# Altium PCB MODULIQ_Hub_ESP32-S3.PcbDoc (part 1 of 2)
Units mm, origin at the board's own origin, x right, y up, seen from the top; angles counter-clockwise.
Board outline 24 x 76.5 mm, 4 copper layers (Top, Layer 1, Layer 2, Bot), stack 1.483 mm thick; 56 components, 63 nets, 265 pads, 248 vias.
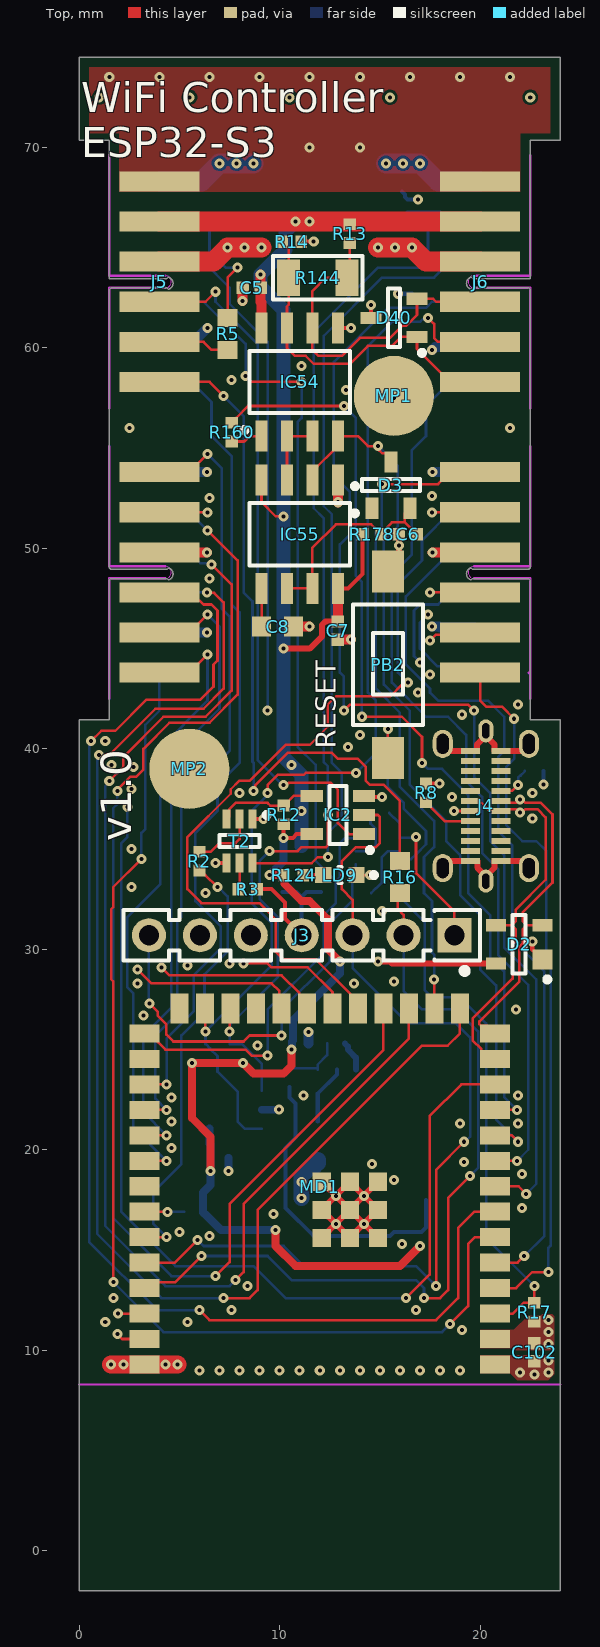
[diagram p0: Top view]
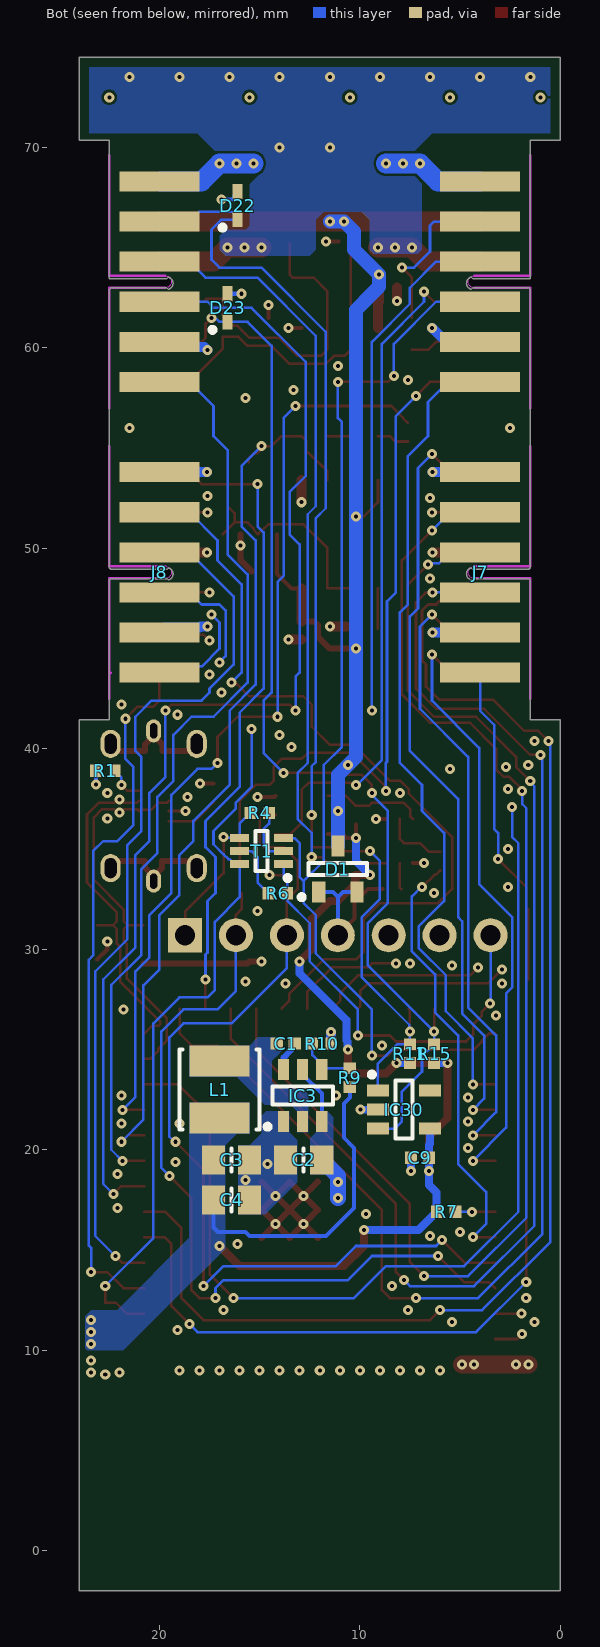
[diagram p1: Bot view, seen from below]
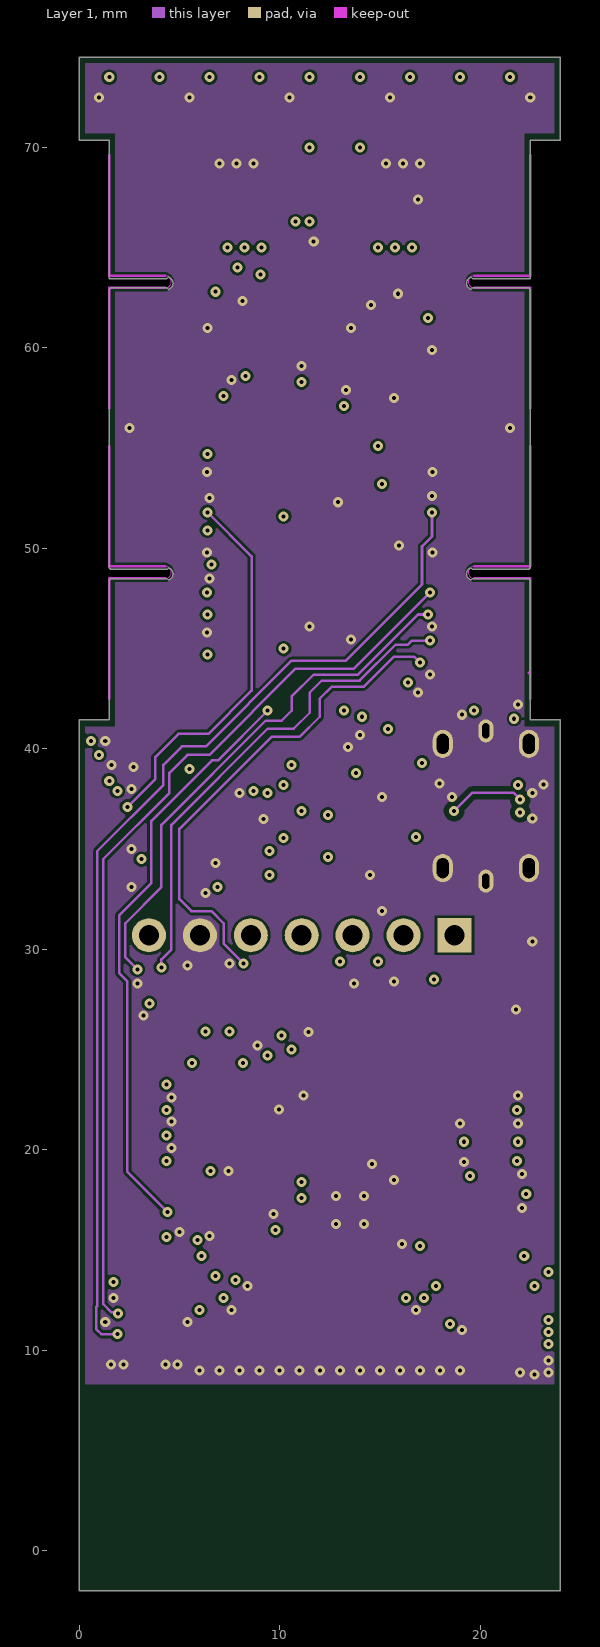
[diagram p2: Layer 1]
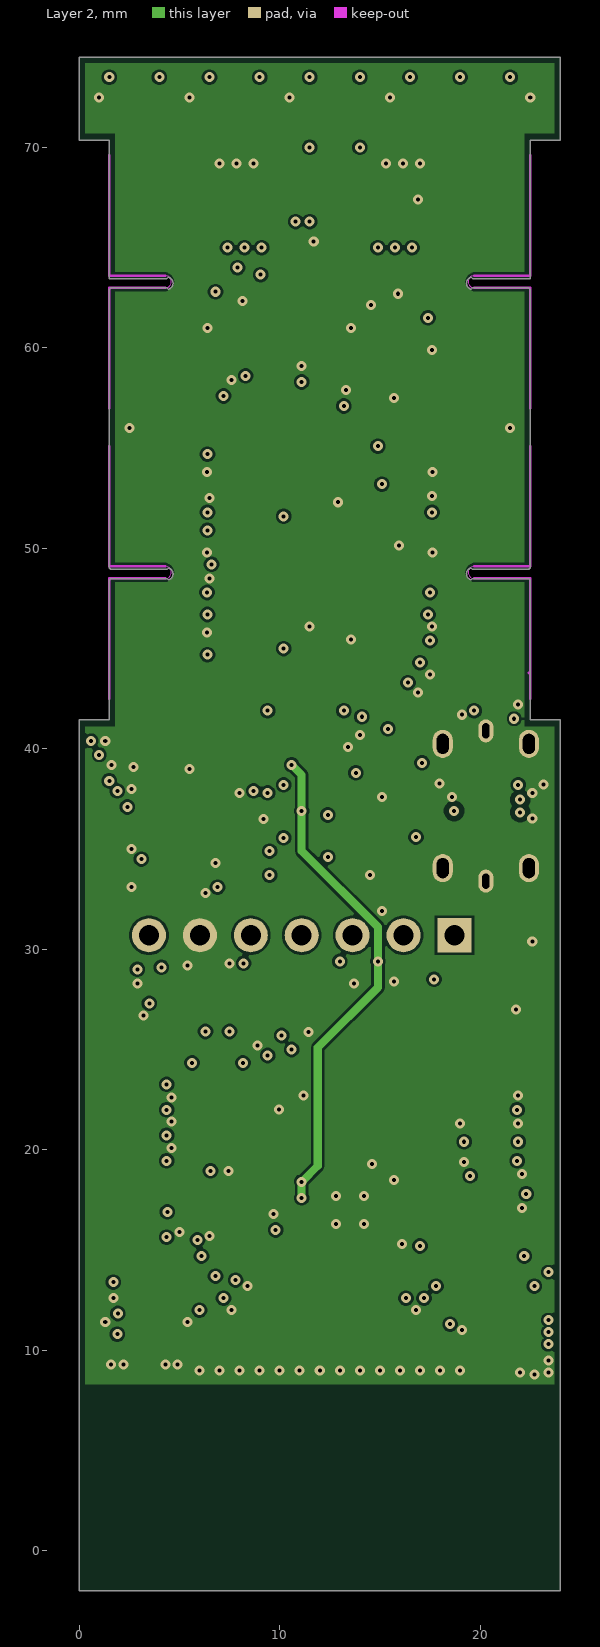
[diagram p3: Layer 2]
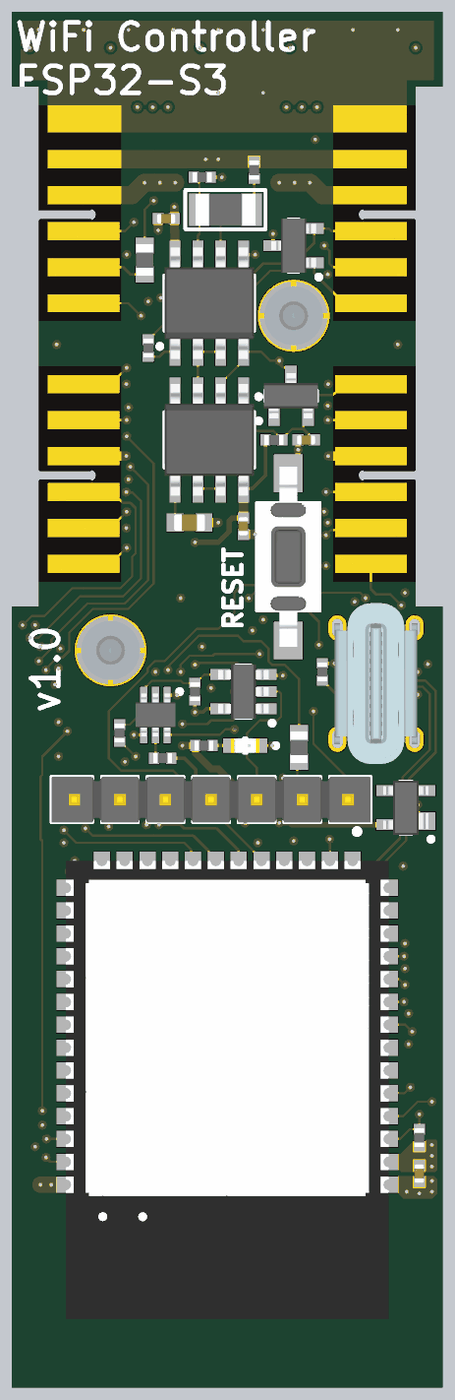
[diagram p4: 3D render of the assembled board from above, using the file's embedded part models]
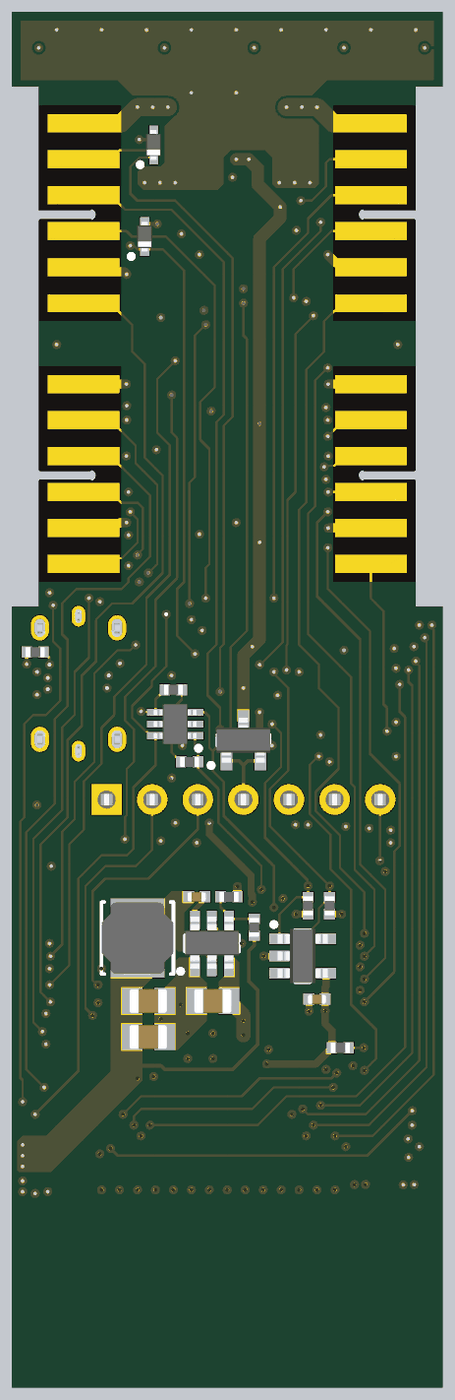
[diagram p5: 3D render of the assembled board from below, using the file's embedded part models]

## Layer stack, top to bottom
TopSolder: solder mask 0.0102, Solder Resist, Dk 3.5
Top: signal copper 0.0356
Dielectric 1: prepreg 0.0711, PP-006, Dk 4.1
Layer 1: signal copper 0.035
Dielectric1: core 1.2, FR-4, Dk 4.8
Layer 2: signal copper 0.035
Dielectric 2: prepreg 0.0711, PP-006, Dk 4.1
Bot: signal copper 0.0356
BottomSolder: solder mask 0.0102, Solder Resist, Dk 3.5

## Board outline
0,-2 0,41.44 1.5,41.44 1.5,48.413 1.577,48.49 4.377,48.49 4.452,48.428 ccw(c4.377,48.723) 4.681,48.723 ccw(c4.377,48.723) 4.452,49.019 4.377,48.957 1.577,48.957 1.5,49.033 1.5,55.023 1.5,62.913 1.577,62.99 4.377,62.99 4.452,62.928 ccw(c4.377,63.223) 4.681,63.223 ccw(c4.377,63.223) 4.452,63.519 4.377,63.457 1.5,63.457 1.5,70.347 0,70.347 0,74.5 24,74.5 24,70.347 22.5,70.347 22.5,63.457 19.623,63.457 19.548,63.519 ccw(c19.623,63.223) 19.319,63.223 ccw(c19.623,63.223) 19.548,62.928 19.623,62.99 22.423,62.99 22.5,62.913 22.5,55.023 22.5,49.033 22.423,48.957 19.623,48.957 19.548,49.019 ccw(c19.623,48.723) 19.319,48.723 ccw(c19.623,48.723) 19.548,48.428 19.623,48.49 22.423,48.49 22.5,48.413 22.5,41.44 24,41.44 24,-2

## Design rules (kind name [scope] priority, off if disabled: settings)
Clearance Clearance_DIFF [(InDifferentialPairClass('All Differential Pairs'))] p1: gap=0.127 ignorepadtopadclearanceinfootprint=FALSE except(0: Arc-Hole Track-Hole SMDPad-Hole THPad-Hole Via-Hole Fill-Hole Poly-Hole Region-Hole Text-Hole; 0.254: Arc-Poly Track-Poly SMDPad-Poly THPad-Poly Via-Poly Fill-Poly Poly-Poly Poly-Region Poly-Text)
Clearance [All] p2: gap=0.127 ignorepadtopadclearanceinfootprint=FALSE
ComponentClearance [All] p1: gap=0.254 collisioncheckmode=3 verticalgap=0.254 showdistances=FALSE donotcheckwithout3dbody=TRUE
DiffPairsRouting [All] p1: maxlimit=0.213 minlimit=0.127 mostfreqgap=0.213 toplayer_mingap=0.213 toplayer_minwidth=0.127 toplayer_maxwidth=0.127 toplayer_prefwidth=0.127 bottomlayer_mingap=0.213 bottomlayer_minwidth=0.127 bottomlayer_maxwidth=0.127 bottomlayer_prefwidth=0.127 impedanceprofiledriven=TRUE impedanceprofileid={C2320997-7D1D-4DD8-87E8-E6E409B28112} impedanceprofilevalue=90.000000 maxuncoupledlength=12.7
FabricationTestPointUsage TestPointUsage [All] p1: valid=0 allowmultiple=FALSE
FabricationTestpoint Testpoint [All] p1: side=3 testpointundercomponent=TRUE minsize=1.016 maxsize=2.54 preferedsize=1.524 minholesize=0.508 maxholesize=1.016 preferedholesize=0.813 testpointgrid=0.025 allowsidetop=TRUE allowsidebottom=TRUE usegrid=TRUE gridtolerance=0
HoleSize [All] p1: absolutevalues=TRUE maxlimit=3.81 minlimit=0.025 maxpercent=80.000 minpercent=20.000
HoleToHoleClearance [All] p1: gap=0.025 allowstackedmicrovias=TRUE
MinimumSolderMaskSliver [All] p1: minsoldermaskwidth=0
PlaneClearance [All] p1: clearance=0.254
PlaneConnect [All] p1: planeconnectstyle=Direct reliefexpansion=0.508 reliefentries=4 reliefconductorwidth=0.254 reliefairgap=0.254
PolygonConnect [All] p1: connectstyle=Direct reliefconductorwidth=0.254 reliefentries=4 polygonreliefangle="45 Angle" airgapwidth=0.254
PolygonConnect PolygonConnect_pad [(InPadClass('All Pads'))] p2: connectstyle=Relief reliefconductorwidth=0.254 reliefentries=4 polygonreliefangle="90 Angle" airgapwidth=0.254
RoomDefinition MODULIQ_Hub_ESP32-S3 [InComponentClass('MODULIQ_Hub_ESP32-S3')] p1 off: confinementstyle=ConfineIn formatcopy=TRUE lockcomponents=FALSE outline 45.15,13.15 227.899,13.15 227.899,36.9 45.15,36.9
RoutingVias [All] p1: holewidth=0.2 width=0.5 viastyle="Through Hole" minholewidth=0.2 minwidth=0.5 maxholewidth=1 maxwidth=1.2
SilkToSilkClearance [All] p1: silktosilkclearance=0
SilkToSolderMaskClearance SilkscreenOverComponentPads [IsPad] p1: minsilkscreentomaskgap=0 clearancetoexposedcopper=TRUE
SolderMaskExpansion [All] p1: expansion=0.051 istentingtop=FALSE
SupplyNets "Schematic Supply Nets_3" [InNet('P5V0')] p1: voltage=0.000
SupplyNets "Schematic Supply Nets_2" [InNet('P3V3')] p2: voltage=0.000
SupplyNets "Schematic Supply Nets_1" [InNet('P12V0')] p3: voltage=0.000
SupplyNets "Schematic Supply Nets" [InNet('GND')] p4: voltage=0.000
Width [All] p1: maxlimit=1.27 minlimit=0.127 preferedwidth=0.127
19 further rules are at their usual default settings.

## Classes and differential pairs
net class D90: USB_D_N USB_D_P
differential pair USB_D: +USB_D_P -USB_D_N

## Components (designator, comment, footprint, x,y, rotation, side; value= is the part's Value field where it differs from the comment)
C1 "100nF" CAPC1005X55N 13.7,25.3 r0 bottom
C2 "22uF" CAPC2012X145N 12.8,19.5 r180 bottom
C3 "22uF" CAPC2012X145N 16.4,19.5 r0 bottom
C4 "22uF" CAPC2012X145N 16.4,17.5 r0 bottom
C5 "100nF" CAPC1005X55N 8.6,63 r180 top
C6 "100nF" CAPC1005X55N 16.4,50.7 r0 top
C7 "100nF" CAPC1005X55N 12.9,45.9 r270 top
C8 "10nF" CAPC1608X87N 9.9,46.1 r180 top
C9 "100nF" CAPC1005X55N 7,19.6 r0 bottom
C102 "1uF" CAPC1005X55N 22.7,9.9 r90 top
D1 "BAT54C" SOT95P240X130-3N 11.1,34 r90 bottom
D2 "PRTR5V0U2X" SOT190P230X110-4N 21.95,30.25 r180 top
D3 "BAT54C" SOT95P240X130-3N 15.55,53.15 r90 top
D22 "PESD3V3S1UB" SODFL1608X65N 16.1,67.1 r90 bottom
D23 "PESD3V3S1UB" SODFL1608X65N 16.6,62 r90 bottom
D40 "SM712" SOT95P237X112-3N 15.7,61.5 r180 top
IC2 "74V1G66STR" SOT95P280X145-5N 12.9,36.7 r180 top
IC3 "AP62201WU-7" SOT95P285X110-6N 12.85,22.7 r90 bottom
IC30 "24AA02E48T-I/OT" SOT95P280X145-5N 7.8,22 r180 bottom
IC54 "ST485ECDR" SOIC127P600X175-8N 11,58.3 r90 top
IC55 "NE555D" SOIC127P600X175-8N 11,50.7 r270 top
J3 "Header 7" SAMTEC_TSW-107-07-L-S-LL 18.72,30.7 r180 top
J4 "USB 3.1" MOLEX_2047110001 20.285,37.148 r90 top
J5 "" EDGE12T1B6_P200W1000L0F100X400 4,63.3 r270 top
J6 "" EDGE12T5B10_P200W1000L0F100X400 20,63.3 r90 top
J7 "" EDGE12T5B10_P200W1000L0F100X400 4,48.8 r90 bottom locked
J8 "" EDGE12T1B6_P200W1000L0F100X400 20,48.8 r270 bottom locked
L1 "2.2uH" IND_MURATA_LQH44PN_P0 17,23 r270 bottom
LD9 "Green" LED_KINGBRIGHT_KPH-1608CGCK 13,33.7 r180 top
MD1 "ESP32-S3-WROOM-1-N4R8" ESP32-S3-WROOM-1 12,15.64 r180 top locked
MP1 "M1.6 x 3mm" 97730306330 15.7,57.6 r0 top
MP2 "M1.6 x 3mm" 97730306330 5.5,39 r0 top
PB2 "Push Button" PB_TYCO_FSMSM 15.4,44.2 r90 top
R1 "5k1" RESC1005X40N 22.7,38.9 r180 bottom
R2 "10k" RESC1005X40N 6,34.4 r90 top
R3 "10k" RESC1005X40N 8.4,33 r0 top
R4 "1k" RESC1005X40N 15,36.8 r180 bottom
R5 "0" RESC1608X55N 7.4,60.7 r270 top
R6 "1k" RESC1005X40N 14.1,32.8 r0 bottom
R7 "1k" RESC1005X40N 5.7,16.9 r180 bottom
R8 "5k1" RESC1005X40N 17.3,37.8 r270 top
R9 "75k" RESC1005X40N 10.5,23.6 r270 bottom
R10 "24k" RESC1005X40N 11.9,25.3 r0 bottom
R11 "10k" RESC1005X40N 7.5,24.8 r270 bottom
R12 "10k" RESC1005X40N 10.2,36.7 r270 top
R13 "1k" RESC1005X40N 13.5,65.7 r270 top
R14 "1k" RESC1005X40N 10.6,65.3 r0 top
R15 "10k" RESC1005X40N 6.3,24.8 r270 bottom
R16 "0" RESC1608X55N 16,33.6 r270 top
R17 "1k" RESC1005X40N 22.7,11.9 r90 top
R124 "1k" RESC1005X40N 10.7,33.7 r180 top
R144 "120R" 1206R 11.9,63.5 r0 top
R160 "1k" RESC1005X40N 7.6,55.8 r270 top
R178 "3k9" RESC1005X40N 14.6,50.7 r0 top
T1 "BC847BS" SOT65P210X110-6N 14.9,34.9 r0 bottom
T2 "BC847BS" SOT65P210X110-6N 8,35.4 r270 top

## Footprints (in the part's own frame and the unit in brackets; to place one, negate y for a bottom-side part, rotate by r counter-clockwise, add the part's x,y. Pads: shape width x height; smd on the part's side, far side on the other; paste and mask are expansions set on the pad)
1206R [mm]
  rect 1.15x1.8 smd: 1(-1.45,0) 2(1.45,0)
  silkscreen extent -2.24,-1.09 2.24,1.09, body extent -1.67,-0.87 1.68,0.88, height 0.65
97730306330 [mm] "SMT Steel Spacer with internal Thread M1.6 Bottom closed, height 3mm"
  round 4 smd paste-2539.97: 1(0,0)
  body extent -1.65,-1.65 1.65,1.65, height 3
CAPC1005X55N [mm] "Capacitor, Non-Polarized, Chip; 1.00mm L X 0.50mm W X 0.70mm H, IPC Medium Density"
  rect 0.62x0.62 smd: 1(-0.45,0) 2(0.45,0)
  body extent -0.52,-0.27 0.53,0.28, height 0.55
CAPC1608X87N [mm] "Chip Capacitor, Body 1.6x0.8mm IPC Medium Density"
  rect 0.95x1 smd: 1(-0.8,0) 2(0.8,0)
  body extent -0.87,-0.47 0.88,0.48, height 0.87
CAPC2012X145N [mm] "Chip Capacitor, Body 2.0x1.45mm, IPC Medium Density"
  rect 1.15x1.45 smd: 1(-0.9,0) 2(0.9,0)
  silkscreen extent 0,-0.58 0,0.58, body extent -1.05,-0.67 1.05,0.68, height 1.45
EDGE12T1B6_P200W1000L0F100X400 [mm] "12 contacts Board Edge Connector, First Left Top Pad 1, First Left Bottom Pad 2, Pitch 2mm, Length 0mm, Width 12.5mm, Finger Lenght 4mm, Finger Width 1mm"
  rect 1x4 smd paste-0.5: 1(-5,0) 2(-3,0) 3(-1,0) 4(1,0) 5(3,0) 6(5,0)
  rect 1x4 smd far side paste-0.5: 7(-5,0) 8(-3,0) 9(-1,0) 10(1,0) 11(3,0) 12(5,0)
  KeepOutLayer lines w0.05: 0.3,0.3 ccw(c0,0.3) -0.3,0.3
  KeepOutLayer lines w0.13: 6.3,-2.5 0.3,-2.5 0.3,0.3 ; -6.3,-2.5 -0.3,-2.5 -0.3,0.3
EDGE12T5B10_P200W1000L0F100X400 [mm] "12 contacts Board Edge Connector, First Left Top Pad 5, First Left Bottom Pad 10, Pitch 2mm, Length 0mm, Width 12.5mm, Finger Lenght 4mm, Finger Width 1mm"
  rect 1x4 smd paste-0.5: 1(5,0) 2(3,0) 3(1,0) 4(-1,0) 5(-3,0) 6(-5,0)
  rect 1x4 smd far side paste-0.5: 7(5,0) 8(3,0) 9(1,0) 10(-1,0) 11(-3,0) 12(-5,0)
  KeepOutLayer lines w0.05: -0.3,0.3 cw(c0,0.3) 0.3,0.3
  KeepOutLayer lines w0.13: -0.3,0.3 -0.3,-2.5 -6.3,-2.5 ; 0.3,0.3 0.3,-2.5 6.3,-2.5
ESP32-S3-WROOM-1 [mm]
  rect 1.5x0.9 smd: 1(-8.75,6.35) 2(-8.75,5.08) 3(-8.75,3.81) 4(-8.75,2.54) 5(-8.75,1.27) 6(-8.75,0) 7(-8.75,-1.27) 8(-8.75,-2.54) 9(-8.75,-3.81) 10(-8.75,-5.08) 11(-8.75,-6.35) 12(-8.75,-7.62) 13(-8.75,-8.89) 14(-8.75,-10.16) 27(8.75,-10.16) 28(8.75,-8.89) 29(8.75,-7.62) 30(8.75,-6.35) 31(8.75,-5.08) 32(8.75,-3.81) 33(8.75,-2.54) 34(8.75,-1.27) 35(8.75,0) 36(8.75,1.27) 37(8.75,2.54) 38(8.75,3.81) 39(8.75,5.08) 40(8.75,6.35)
  rect 0.9x1.5 smd: 15(-6.985,-11.405) 16(-5.715,-11.405) 17(-4.445,-11.405) 18(-3.175,-11.405) 19(-1.905,-11.405) 20(-0.635,-11.405) 21(0.635,-11.405) 22(1.905,-11.405) 23(3.175,-11.405) 24(4.445,-11.405) 25(5.715,-11.405) 26(6.985,-11.405)
  rect 0.9x0.9 smd: PAD(-2.9,-1.365) PAD(-2.9,0.035) PAD(-2.9,-2.765) PAD(-1.5,0.035) PAD(-1.5,-1.365) PAD(-1.5,-2.765) PAD(-0.1,0.035) PAD(-0.1,-1.365) PAD(-0.1,-2.765)
  body extent -9,-11.66 9,13.84, height 3.12
IND_MURATA_LQH44PN_P0 [mm] "Wire Wound Ferrite Inductor for Power Lines, 4mm L X 4mm W X 1.65mm H, MURATA LQH44PN_P0 Series"
  rect 1.55x3 smd: 1(-1.425,0) 2(1.425,0)
  silkscreen extent -2,-2 2,2, body extent -2,-2 2,2, height 1.65
LED_KINGBRIGHT_KPH-1608CGCK [mm] "SMT Green LED, Case 0603, Body L 1.6 x W 0.8mm H 0.65mm"
  rect 0.8x0.8 smd: 1(-0.825,0) 2(0.825,0)
  silkscreen extent -1.83,-0.4 0.08,0.4, body extent -0.8,-0.4 0.8,0.4, height 0.65
MOLEX_2047110001 [mm]
  rect 0.3x0.95 smd: A1(2.75,-0.75) A2(2.25,-0.75) A3(1.75,-0.75) A4(1.25,-0.75) A5(0.75,-0.75) A6(0.25,-0.75) A7(-0.25,-0.75) A8(-0.75,-0.75) A9(-1.25,-0.75) A10(-1.75,-0.75) A11(-2.25,-0.75) A12(-2.75,-0.75) B1(-2.75,0.755) B2(-2.25,0.755) B3(-1.75,0.755) B4(-1.25,0.755) B5(-0.75,0.755) B6(-0.25,0.755) B7(0.25,0.755) B8(0.75,0.755) B9(1.25,0.755) B10(1.75,0.755) B11(2.25,0.755) B12(2.75,0.755)
  oval 1.15x0.75 hole 0.35 slot 0.75 at 0 deg: SHIELD(-3.75,0) SHIELD(3.75,0)
  oval 1.4x1 hole 0.6 slot 1 at 0 deg: SHIELD(-3.1,-2.15) SHIELD(-3.1,2.15) SHIELD(3.1,-2.15) SHIELD(3.1,2.15)
  body extent -4.47,-2.3 4.47,2.3, height 9.06
PB_TYCO_FSMSM [mm] "Body 3.5x6.0mm, Pushbutton Switch,  TYCO FSMSM Serie"
  rect 2.1x1.6 smd: 1(-4.65,0) 2(4.65,0)
  silkscreen extent -3,-1.75 3,1.75, body extent -5,-1.75 5,1.75, height 4.3
RESC1005X40N [mm] "Chip Resistor, EIA 0402, Metric 1005, Body 1.0x0.5mm, IPC Medium Density"
  rect 0.58x0.62 smd: 1(-0.47,0) 2(0.47,0)
  body extent -0.52,-0.27 0.53,0.28, height 0.4
RESC1608X55N [mm] "Chip Resistor, EIA 0603, Metric 1608, Body 1.6x0.8mm, IPC Medium Density"
  rect 0.9x1 smd: 1(-0.8,0) 2(0.8,0)
  body extent -0.87,-0.47 0.88,0.48, height 0.55
SAMTEC_TSW-107-07-L-S-LL [mm] "7 Contacts - Pitch 2.54mm - Single Row  Through Mount Straigh Header (Post Lead 5.84mm, Tail Lead 2.54mm, Insulator 2.54mm)"
  rect 1.7x1.7 hole 1: 1(0,0)
  round 1.7 hole 1: 2(2.54,0) 3(5.08,0) 4(7.62,0) 5(10.16,0) 6(12.7,0) 7(15.24,0)
  silkscreen extent -1.27,-1.27 16.51,1.93, body extent -1.27,-1.27 16.51,1.27, height 8.38
SODFL1608X65N [mm] "Ultra Small Outline Diode Flat Lead (SOD-523), Body; 1.2mm L X 0.8mm W X 0.65mm H, IPC Medium Density"
  rect 0.75x0.5 smd: 1(-0.7,0) 2(0.7,0)
  silkscreen extent -1.22,0.63 -0.98,0.88, body extent -0.82,-0.42 0.83,0.43, height 0.65
SOIC127P600X175-8N [mm] "SOIC 8, Pitch 1.27mm - Body 4x5mm, IPC Medium Density"
  rect 1.55x0.6 smd: 1(-2.7,1.905) 2(-2.7,0.635) 3(-2.7,-0.635) 4(-2.7,-1.905) 5(2.7,-1.905) 6(2.7,-0.635) 7(2.7,0.635) 8(2.7,1.905)
  silkscreen extent -2.52,-2.5 1.55,2.88, body extent -3.1,-2.5 3.1,2.5, height 1.75
SOT65P210X110-6N [mm] "SOT363, SC70-6, SOT, 0.65mm Pitch, 6 Pin, 1.25mm W X 2.00mm L X 1.10mm H, IPC Medium Density"
  rect 0.95x0.4 smd: 1(-1.1,0.65) 2(-1.1,0) 3(-1.1,-0.65) 4(1.1,-0.65) 5(1.1,0) 6(1.1,0.65)
  silkscreen extent -1.42,-1 0.3,1.47, body extent -1.2,-1.1 1.2,1.1, height 1.1
SOT95P237X112-3N [mm] "SOT, 0.95mm, pitch; 3 pin,1.30mm W X 2.92mm L X 1.12mm H body, IPC Medium Density"
  rect 1.05x0.6 smd: 1(-1.15,0.95) 2(-1.15,-0.95) 3(1.15,0)
  silkscreen extent -1.53,-1.45 0.3,1.87, body extent -1.25,-1.5 1.25,1.5, height 1.1
SOT95P240X130-3N [mm] "SOT23 3-Leads, Pitch 0.95mm - Body 1.3x2.9mm, IPC Medium Density"
  rect 1.05x0.65 smd: 1(-1.15,0.95) 2(-1.15,-0.95) 3(1.15,0)
  silkscreen extent -1.52,-1.45 0.3,1.92, body extent -1.25,-1.5 1.25,1.5, height 1.3
SOT95P280X145-5N [mm] "SOT, 0.95mm pitch; 5 pin, 1.60mm W X 2.90mm L X 1.45mm H body, IPC Medium Density"
  rect 1.1x0.6 smd: 1(-1.3,0.95) 2(-1.3,0) 3(-1.3,-0.95) 4(1.3,-0.95) 5(1.3,0.95)
  silkscreen extent -1.73,-1.45 0.43,1.87, body extent -1.4,-1.5 1.4,1.5, height 1.45
SOT95P285X110-6N [mm] "SOT, 0.95mm, pitch; 6 pin,1.625mm W X 3.025mm L X 1.10mm H body, IPC Medium Density"
  rect 1.05x0.55 smd: 1(-1.3,0.95) 2(-1.3,0) 3(-1.3,-0.95) 4(1.3,-0.95) 5(1.3,0) 6(1.3,0.95)
  silkscreen extent -1.67,-1.5 0.45,1.88, body extent -1.4,-1.5 1.48,1.5, height 1.1
SOT190P230X110-4N [mm] "SOT143, SOT, 1.90mm Pitch; 4 Pin, 1.30mm W X 2.90mm L X 1.10mm H body, IPC Medium Density"
  rect 1x1 smd: 1(-1.15,0.75)
  rect 1x0.6 smd: 2(-1.15,-0.95) 3(1.15,-0.95) 4(1.15,0.95)
  silkscreen extent -1.53,-1.45 0.33,1.87, body extent -1.25,-1.5 1.25,1.5, height 1.1

## Part data
C1: library part CC0402_100NF_16V_10%_X5R, "Non-polarised capacitor", Case=0402, Manufacturer=GENERIC, Manufacturer1 ComponentHeight=0.55mm, Manufacturer1 Example=MURATA, Manufacturer1 Part Number=GRM155R61C104KA88D, Tolerance=±10%, Voltage=16V, Author="CERN DEM JLC", Component Type=Standard, CreateDate=2013-12-10, HelpURL=\\cern.ch\dfs\Applications\Altium\Datasheets\CC0402_X5R_MURATA_GRM.pdf, LatestRevisionDate=2013-12-10, Manufacturer Part Number=CC0402_100NF_16V_10%_X5R, Mounted=Yes, Part Description="SMD Multilayer Chip Ceramic Capacitor", Part Number=CC0402_100NF_16V_10%_X5R, Pin Count=2, SMD=Yes, Socket=No, Status=None, Table="Capacitors SMD", TC=X5R
C2 C3 C4: library part CC0805_22UF_25V_20%_X5R, "Non-polarised capacitor", Case=0805, Manufacturer=GENERIC, Manufacturer1 ComponentHeight=1.45mm, Manufacturer1 Example=MURATA, Manufacturer1 Part Number=GRM21BR61E226ME44, Tolerance=±20%, Voltage=25V, Author="CERN DEM WB", Component Type=Standard, ComponentHeight=1.45mm, CreateDate=08.10.2021, HelpURL=\\cern.ch\dfs\Applications\Altium\Datasheets\CC0805_MURATA_GRM21BR61E226ME44.pdf, LatestRevisionDate=08.10.2021, Manufacturer Part Number=CC0805_22UF_25V_20%_X5R, Mounted=Yes, Part Description="Chip Multilayer Ceramic Capacitor for General Purpose", Part Number=CC0805_22UF_25V_20%_X5R, Pin Count=2, Sense=No, SMD=Yes, Socket=No, Status=Preferred, TC=X5R
C5 C6 C7 C9: library part CC0402_100NF_16V_10%_X7R, "Non-polarised capacitor", Case=0402, Manufacturer=GENERIC, Manufacturer1 ComponentHeight=0.55mm, Manufacturer1 Example=MURATA, Manufacturer1 Part Number=GRM155R71C104KA88D, Tolerance=±10%, Voltage=16V, Author="CERN DEM JLC", Component Type=Standard, CreateDate=05.12.2013, HelpURL=\\cern.ch\dfs\Applications\Altium\Datasheets\CC0402_X7R_MURATA_GRM.pdf, LatestRevisionDate=03.12.2007, Manufacturer Part Number=CC0402_100NF_16V_10%_X7R, Mounted=Yes, Part Description="SMD Multilayer Chip Ceramic Capacitor", Part Number=CC0402_100NF_16V_10%_X7R, Pin Count=2, Sense=No, SMD=Yes, Socket=No, Status="Not Recommended", TC=X7R
C8: library part CC0603_10NF_50V_5%_C0G, "Non-polarised capacitor", Case=0603, Manufacturer=GENERIC, Manufacturer1 ComponentHeight=0.9mm, Manufacturer1 Example=TDK, Manufacturer1 Part Number=C1608C0G1H103J080AA, Tolerance=±5%, Voltage=50V, Author="CERN DEM JLC", Component Type=Standard, CreateDate=10.12.2014, HelpURL=\\cern.ch\dfs\Applications\Altium\Datasheets\CC0603_C0G_TDK_C.pdf, LatestRevisionDate=10.12.2014, Manufacturer Part Number=CC0603_10NF_50V_5%_C0G, Mounted=Yes, Part Description="SMD Multilayer Chip Ceramic Capacitor", Part Number=CC0603_10NF_50V_5%_C0G, Pin Count=2, Sense=No, SMD=Yes, Socket=No, Status=Preferred, TC=C0G/NP0
C102: library part CC0402_1UF_16V_10%_X5R, "Non-polarised capacitor", Case=0402, Manufacturer=GENERIC, Manufacturer1 ComponentHeight=0.55mm, Manufacturer1 Example=TDK, Manufacturer1 Part Number=C1005X5R1C105KT, Tolerance=±10%, Voltage=16V, Author="CERN DEM JLC", Component Type=Standard, CreateDate=25.10.2012, HelpURL=\\cern.ch\dfs\Applications\Altium\Datasheets\CC0402_X5R_TDK_C.pdf, LatestRevisionDate=25.10.2012, Manufacturer Part Number=CC0402_1UF_16V_10%_X5R, Mounted=Yes, Part Description="SMD Multilayer Chip Ceramic Capacitor", Part Number=CC0402_1UF_16V_10%_X5R, Pin Count=2, Sense=No, SMD=Yes, Socket=No, Status=Preferred, TC=X5R
D1 D3: "Dual Common Cathode Schottky Diodes", Case=SOT23-3, Manufacturer="FAIRCHILD SEMICONDUCTOR", Power=200mA, Voltage=30V, Author="CERN DEM JLC", Bonding=No, Component Type=Standard, ComponentHeight=1.30mm, CreateDate=17.09.2009, Device=BAT54C, HelpURL=\\cern.ch\dfs\Applications\Altium\Datasheets\BAT54C.pdf, LatestRevisionDate=27.05.2010, Manufacturer Part Number=BAT54C, Mounted=Yes, PackageDescription="SOT23 3-Leads, Pitch 0.95mm - Body 1.3x2.9mm, IPC Medium Density", Part Description="Dual Common Cathode Small Signal Schottky Diode", Part Number=BAT54C, Pin Count=3, PressFit=No, Sense=No, SMD=Yes, Socket=No
D2: "Ultra Low Capacitance Double Rail-to-Rail ESD Protection Diode", Case=SOT143B, Manufacturer="NXP SEMICONDUCTORS", Voltage=5.5V, Author="CERN DEM JLC", Bonding=No, Component Type=Standard, ComponentHeight=1.1mm, CreateDate=3/22/2011, Device=PRTR5V0U2X, HelpURL=\\cern.ch\dfs\Applications\Altium\Datasheets\PRTR5V0U2X.pdf, LatestRevisionDate=3/22/2011, Manufacturer Part Number=PRTR5V0U2X, Mounted=Yes, PackageDescription="SOT143B, SOT, 1.90mm Pitch; 4 Pin, 1.30mm W X 2.90mm L X 1.10mm H body, IPC Medium Density", Part Description="Ultra Low Capacitance (1pF) Double Rail-to-Rail ESD Protection Diode (8kV)", Part Number=PRTR5V0U2X, Pin Count=4, PressFit=No, Sense=No, SMD=Yes, Socket=No
D22 D23: "ESD protection diode", Case=SOD523, Manufacturer="NXP SEMICONDUCTORS", Power=330W, Voltage=3V3, Author="CERN DEM JLC", Bonding=No, ComponentHeight=0.65mm, Component Type=Standard, CreateDate=29.11.2012, Device=PESD3V3S1UB, HelpURL=\\cern.ch\dfs\Applications\Altium\Datasheets\PESD3V3S1UB.pdf, LatestRevisionDate=29.11.2012, Manufacturer Part Number=PESD3V3S1UB, Mounted=Yes, PackageDescription="Ultra Small Outline Diode Flat Lead (SOD-523), Body; 1.2mm L X 0.8mm W X 0.65mm H, IPC Medium Density", Part Description="ESD protection diode (23kV)", Part Number=PESD3V3S1UB, Pin Count=2, PressFit=No, Sense=No, SMD=Yes, Socket=No
D40: "Asymmetrical TVS Diode for Extended Common-Mode RS-485", Case=SOT-23, Manufacturer=SEMTECH, Power=400W, Voltage=12V/-7V, Author="CERN DEM JLC", Bonding=No, ComponentHeight=1.12mm, Component Type=Standard, CreateDate=23.04.2012, Device=SM712, HelpURL=\\cern.ch\dfs\Applications\Altium\Datasheets\SM712.pdf, LatestRevisionDate=23.04.2012, Manufacturer Part Number=SM712, Mounted=Yes, PackageDescription="SOT, 0.95mm, pitch; 3 pin,1.30mm W X 2.92mm L X 1.12mm H body, IPC Medium Density", Part Description="Asymmetrical TVS Diode for Extended Common-Mode RS-485", Part Number=SM712, Pin Count=3, PressFit=No, Sense=No, SMD=Yes, Socket=No, Status=Obsolete
IC2: "Single Bilateral Switch", Case=SOT23-5, Manufacturer="ST MICROELECTRONICS", Author="CERN DEM JLC", Bonding=No, Component Type=Standard, ComponentHeight=1.45mm, CreateDate=20.01.2014, Device=74V1G66STR, HelpURL=\\cern.ch\dfs\Applications\Altium\Datasheets\74V1G66STR.pdf, LatestRevisionDate=20.01.2014, Manufacturer Part Number=74V1G66STR, Mounted=Yes, PackageDescription="SOT, 0.95mm pitch; 5 pin, 1.60mm W X 2.90mm L X 1.45mm H body, IPC Medium Density", Part Description="Single Bilateral Switch", Part Number=74V1G66STR, Pin Count=5, PressFit=No, Sense=No, SMD=Yes, Socket=No
IC3: library part PM_AP62201WU-7, "LIGHT LOAD IMPROVED 1.5A SYNCH DC/DC BUCK CONVERTER", Case=SOT26, Manufacturer="DIODES INCORPORATED", Author=GK, Bonding=No, Component Type=Standard, ComponentHeight=1.45mm, CreateDate=10.07.2015, Device=AP62201WU-7, HelpURL=\\cern.ch\dfs\Applications\Altium\Datasheets\AP133-WG-7.pdf, LatestRevisionDate=10.07.2015, Manufacturer Part Number=AP62201WU-7, Mounted=Yes, PackageDescription="SOT23, 0.95mm pitch; 6 pin, 1.6mm W X 3.0mm L X 1.45mm H body, IPC Medium Density", Part Description="LIGHT LOAD IMPROVED 1.5A SYNCH DC/DC BUCK CONVERTER", Part Number=AP62201WU-7, Pin Count=5, PressFit=No, Sense=No, SMD=Yes, Socket=No
IC30: "1.7V-5.5V, 2K I2C Serial EEPROM With EUI-48 Node Identity", Case=SOT23-5, Manufacturer="MICROCHIP TECHNOLOGY", Author="CERN DEM MR", Bonding=No, ComponentHeight=1.45mm, Component Type=Standard, CreateDate=31.03.2016, Device=24AA02E48T-I/OT, HelpURL=\\cern.ch\dfs\Applications\Altium\Datasheets\24AA02E48T-I-OT.pdf, LatestRevisionDate=31.03.2016, Manufacturer Part Number=24AA02E48T-I/OT, Mounted=Yes, PackageDescription="SOT, 0.95mm pitch; 5 pin, 1.60mm W X 2.90mm L X 1.45mm H body, IPC Medium Density", Part Description="1.7V-5.5V, 2K I2C Serial EEPROM With EUI-48 Node Identity", Part Number=24AA02E48T-I/OT, Pin Count=5, PressFit=No, Sense=No, SMD=Yes, Socket=No
IC54: "±15kV ESD-Protected, Low Power  RS-485/RS-422 Transceiver", Case=SOIC8, Manufacturer="ST MICROELECTRONICS", Author="CERN DEM MR", Bonding=No, ComponentHeight=1.75mm, Component Type=Standard, CreateDate=15.02.2018, Device=ST485ECDR, HelpURL=\\cern.ch\dfs\Applications\Altium\Datasheets\ST485ECDR.pdf, LatestRevisionDate=15.02.2018, Manufacturer Part Number=ST485ECDR, Mounted=Yes, PackageDescription="SOIC 8, Pitch 1.27mm - Body 4x5mm, IPC Medium Density", Part Description="±15kV ESD-Protected, Low Power  RS-485/RS-422 Transceiver", Part Number=ST485ECDR, Pin Count=8, PressFit=No, Sense=No, SMD=Yes, Socket=No
IC55: "Precision Timer", Case=SOIC8, Manufacturer="TEXAS INSTRUMENTS", Author="CERN DEM JMW", Bonding=No, ComponentHeight=1.75mm, Component Type=Standard, CreateDate=16.04.2009, Device=NE555D, HelpURL=\\cern.ch\dfs\Applications\Altium\Datasheets\NE555D.pdf, LatestRevisionDate=16.04.2009, Manufacturer Part Number=NE555D, Mounted=Yes, PackageDescription="SOIC 8, Pitch 1.27mm, Body 4x5mm, IPC Medium Density", Part Description="Precision Timer", Part Number=NE555D, Pin Count=8, PressFit=No, Sense=No, SMD=Yes, Socket=No
J3: library part SAMTEC_TSW-107-07-L-S-LL, "Connector 7 Male", Manufacturer=SAMTEC, Manufacturer Part Number=TSW-107-07-L-S-LL, Author="CERN DEM MR", Component Type=Standard, ComponentHeight=8.38mm, CreateDate=07.12.2016, Family="Header 7", HelpURL=\\cern.ch\dfs\Applications\Altium\Datasheets\SAMTEC_TSW-107-07-L-S-LL.pdf, LatestRevisionDate=07.12.2016, Mounted=Yes, Part Description="7 Contacts, Pitch 2.54mm, Single Row  Through Mount Straigh Header (Post Lead 5.84mm, Tail Lead 2.54mm, Insulator 2.54mm)", Part Number=SAMTEC_TSW-107-07-L-S-LL, Pin Count=7, PressFit=No, Sense=No, SMD=No, Socket=No, Status=None
J4: library part 2047110001, "2x12 Pin + 1 Shield  USB Type C Receptacle", Arena Part Number=125-000079, Manufacturer=MOLEX, Author="Michal Beldyga", Component Type=Standard, ComponentHeight=9.8mm, CreateDate=4/29/2025, Family="USB 3.1", LatestRevisionDate=4/29/2025, Manufacturer Part Number=2047110001, Part Description="Universal Serial Bus (USB) Shielded I/O Receptacle, Type C, Vertical, Surface Mount, 0.76µm Gold (Au) Plating, 1.40mm Solder Tab", Part Number=2047110001, Pin Count=30, PressFit=No, SMD=Yes, Status=Active
J5 J8: library part "PCB Edge Connector 12 (2x6)", "PCB Edge Connector 12 (2x6)", Part Number=EDGE10T1B6_P200W1000L0F100X400, Author="CERN DEM MR", Component Type="Standard (No BOM)", ComponentHeight=0mm, CreateDate=14.02.2018, HelpURL=\\cern.ch\dfs\Applications\Altium\Datasheets\EDGE10T1B6_P200W1000L0F100X400.pdf, LatestRevisionDate=14.02.2018, Mounted=No, Part Description="10 Contacts Board Edge Connector, Pitch 2mm, Length 0mm, Width 10mm, Finger Lenght 4mm, Finger Width 1mm", Pin Count=12, PressFit=No, Sense=No, SMD=No, Socket=No, Status=None
J6 J7: library part "PCB Edge Connector 12 (2x6) R", "PCB Edge Connector 12 (2x6)", Part Number=EDGE12T5B10_P200W1000L0F100X400, Author=GK, Component Type="Standard (No BOM)", ComponentHeight=0mm, CreateDate=14.02.2018, HelpURL=\\cern.ch\dfs\Applications\Altium\Datasheets\EDGE10T5B10_P200W1000L0F100X400.pdf, LatestRevisionDate=14.02.2018, Mounted=No, Part Description="12 Contacts Board Edge Connector, Pitch 2mm, Length 0mm, Width 10mm, Finger Lenght 4mm, Finger Width 1mm", Pin Count=12, PressFit=No, Sense=No, SMD=No, Socket=No, Status=None
L1: library part IND_2.2UH_20%_MURATA_LQH44PN2R2MP0L, "Inductor With Core", Case=4040, Manufacturer=MURATA, Manufacturer Part Number=LQH44PN2R2MP0L, Power=1.8A, Resistance=0R049, Tolerance=±20%, Author="CERN DEM JLC", Component Type=Standard, ComponentHeight=1.8mm, CreateDate=14.02.2018, HelpURL=\\cern.ch\dfs\Applications\Altium\Datasheets\IND_MURATA_LQH44PN_P0.pdf, LatestRevisionDate=14.02.2018, Mounted=Yes, Part Description="Wire Wound Ferrite Inductor for Power Lines", Part Number=IND_2.2UH_20%_MURATA_LQH44PN2R2MP0L, Pin Count=2, Sense=No, SMD=Yes, Socket=No, Status=None
LD9: library part LED_KINGBRIGHT_KPH-1608CGCK, "LED Green 1C 2A", Manufacturer=KINGBRIGHT, Manufacturer Part Number=KPH-1608CGCK, Author="CERN DEM JLC", Bonding=No, Color=Green, Component Type=Standard, ComponentHeight=0.65mm, CreateDate=03/07/2017, HelpURL=\\cern.ch\dfs\Applications\Altium\Datasheets\LED_KINGBRIGHT_KPH-1608CGCK.pdf, LatestRevisionDate=03/07/2017, Mounted=Yes, PackageDescription="SMT Green LED, Case 0603, Body L 1.6 x W 0.8mm H 0.65mm", Part Description="SMD Green LED, Case 1.6mmX0.8mm(0603), 0.65mm Thickness", Part Number=LED_KINGBRIGHT_KPH-1608CGCK, Pin Count=2, PressFit=No, Sense=No, SMD=Yes, Socket=No
MD1: "WiFi-Modul 802.11/BT 2, 4-2, 5GHz 150Mb/s", Manufacturer="Espressif Systems", Max Operating Temperature=65°C, Max Supply Voltage=3.6V, Min Operating Temperature=-40°C, Min Supply Voltage=3V, Operating Supply Voltage=3.3V, Supplier Part Number=5407-ESP32-S3-WROOM-1-N4R8CT-ND, ComponentLink1Description=https://datasheet.octopart.com/ESP32-S3-WROOM-1-N4R8-Espressif-Systems-datasheet-165560563.pdf?src-supplier=TME, ComponentLink1URL=https://datasheet.octopart.com/ESP32-S3-WROOM-1-N4R8-Espressif-Systems-datasheet-165560563.pdf?src-supplier=TME, Height - Seated (Max)=3.25mm, Length=25.5mm, Manufacturer Part Number=ESP32-S3-WROOM-1-N4R8, Pins=41NUMBER, Pricing="1=5.71, 10=4.941, 25=4.6748, 100=4.3087, 250=4.0894, 650=3.87826, 1300=3.7356, 1950=3.65604 (USD)", RoHS=No, Stock=3923, Supplier=Digikey, Terminal Pitch=1.27mm, Width=18mm
MP1 MP2: library part 97730306330R, "WA-SMSI SMT Steel Spacer with internal Thread Bottom closed, OD 3.3mm, M1.6 x 3mm", Manufacturer="Wurth Elektronik", Operating Temperature Max=150°C, Operating Temperature Min=-55°C, Category="SMT Spacers", ComponentLink1Description="Website Link", ComponentLink1URL=https://www.we-online.com/redexpert/article/97730306330R?ad, ComponentLink2Description="Datasheet Link", ComponentLink2URL=https://www.we-online.com/redexpert/spec/97730306330R?ad, Height=3mm, Inside Thread Length=1.8mm, Manufacturer Part Number=97730306330R, Match Code=WA-SMSI, Material=Steel, Mount="Surface Mount", Outside Diameter=3.3mm, Packaging="Tape and Reel", Surface=Tin, Thread Size=M1.6
PB2: library part PB_TYCO_FSMSM, "Push-Button Switch SPDT", Manufacturer="TYCO ELECTRONICS", Manufacturer Part Number="FSMSM or 1437566-3", Author="CERN DEM JLC", ComponentHeight=4.3mm, Component Type=Standard, CreateDate=30.06.2008, Family="Push Button", HelpURL=\\cern.ch\dfs\Applications\Altium\Datasheets\PB_TYCO_FSMSM.pdf, LatestRevisionDate=21.06.2012, Mounted=Yes, PackageDescription="Body 3.5x6.0mm, Pushbutton Switch,  TYCO ALCOSWITCH FSMSM Serie", Part Description="12VDC 50mA SPST Tactile  Push-Button Switch", Part Number=PB_TYCO_FSMSM, Pin Count=2, PressFit=No, Sense=No, SMD=Yes, Socket=No, Status=None
R1 R8: library part R0402_5K1_1%_0.0625W_100PPM, "Resistor - 1%", Case=0402, Manufacturer=GENERIC, Manufacturer1 ComponentHeight=0.4mm, Manufacturer1 Example="YAGEO PHYCOMP", Manufacturer1 Part Number=232270675102L, Power=0.0625W, Tolerance=±1%, Author="CERN DEM JLC", Component Type=Standard, CreateDate=12/3/2007, HelpURL=\\cern.ch\dfs\Applications\Altium\Datasheets\R0402_Phycomp_RC0402.pdf, LatestRevisionDate=10/17/2012, Manufacturer Part Number=R0402_5K1_1%_0.0625W_100PPM, Mounted=Yes, Part Description="General Purpose Thick Film Chip Resistor", Part Number=R0402_5K1_1%_0.0625W_100PPM, Pin Count=2, PressFit=No, Sense=No, SMD=Yes, Socket=No, Status="Not Recommended", TC=±100ppm/°C
R2 R3 R11 R12 R15: library part R0402_10K_1%_0.0625W_100PPM, "Resistor - 1%", Case=0402, Manufacturer=GENERIC, Manufacturer1 ComponentHeight=0.4mm, Manufacturer1 Example="YAGEO PHYCOMP", Manufacturer1 Part Number=232270671003L, Power=0.0625W, Tolerance=±1%, Author="CERN DEM JLC", Component Type=Standard, CreateDate=2007-12-03, HelpURL=\\cern.ch\dfs\Applications\Altium\Datasheets\R0402_Phycomp_RC0402.pdf, LatestRevisionDate=2012-10-17, Manufacturer Part Number=R0402_10K_1%_0.0625W_100PPM, Mounted=Yes, Part Description="General Purpose Thick Film Chip Resistor", Part Number=R0402_10K_1%_0.0625W_100PPM, Pin Count=2, SMD=Yes, Socket=No, Status="Not recommended", Table="Resistors SMD", TC=±100ppm/°C
R4 R6 R7 R13 R14 R17 R124 R160: library part R0402_1K_1%_0.0625W_100PPM, "Resistor - 1%", Case=0402, Manufacturer=GENERIC, Manufacturer1 ComponentHeight=0.4mm, Manufacturer1 Example="YAGEO PHYCOMP", Manufacturer1 Part Number=232270671002L, Power=0.0625W, Tolerance=±1%, Author="CERN DEM JLC", Component Type=Standard, CreateDate=03.12.2007, HelpURL=\\cern.ch\dfs\Applications\Altium\Datasheets\R0402_Phycomp_RC0402.pdf, LatestRevisionDate=17.10.2012, Manufacturer Part Number=R0402_1K_1%_0.0625W_100PPM, Mounted=Yes, Part Description="General Purpose Thick Film Chip Resistor", Part Number=R0402_1K_1%_0.0625W_100PPM, Pin Count=2, PressFit=No, Sense=No, SMD=Yes, Socket=No, Status="Not Recommended", TC=±100ppm/°C
R5 R16: library part R0603_0R_JUMPER, "Resistor", Case=0603, Manufacturer=GENERIC, Manufacturer1 ComponentHeight=0.55mm, Manufacturer1 Example="NIC COMPONENT", Manufacturer1 Part Number=NRC06Z0, Author="CERN DEM JLC", Component Type=Standard, CreateDate=03.12.2007, HelpURL=\\cern.ch\dfs\Applications\Altium\Datasheets\R0603_NIC_NRC.pdf, LatestRevisionDate=13.03.2008, Manufacturer Part Number=R0603_0R_JUMPER, Mounted=Yes, Part Description="1A (0.05R Max DC Resistance) Zero Ohm Jumper", Part Number=R0603_0R_JUMPER, Pin Count=2, PressFit=No, Sense=No, SMD=Yes, Socket=No, Status=Preferred
R9: library part R0402_75K_1%_0.0625W_100PPM, "Resistor - 1%", Case=0402, Manufacturer=GENERIC, Manufacturer1 ComponentHeight=0.4mm, Manufacturer1 Example="YAGEO PHYCOMP", Manufacturer1 Part Number=232270677503L, Power=0.0625W, Tolerance=±1%, Author="CERN DEM JLC", Component Type=Standard, CreateDate=03.12.2007, HelpURL=\\cern.ch\dfs\Applications\Altium\Datasheets\R0402_Phycomp_RC0402.pdf, LatestRevisionDate=17.10.2012, Manufacturer Part Number=R0402_75K_1%_0.0625W_100PPM, Mounted=Yes, Part Description="General Purpose Thick Film Chip Resistor", Part Number=R0402_75K_1%_0.0625W_100PPM, Pin Count=2, PressFit=No, Sense=No, SMD=Yes, Socket=No, Status="Not Recommended", TC=±100ppm/°C
R10: library part R0402_24K_1%_0.0625W_100PPM, "Resistor - 1%", Case=0402, Manufacturer=GENERIC, Manufacturer1 ComponentHeight=0.4mm, Manufacturer1 Example="YAGEO PHYCOMP", Manufacturer1 Part Number=232270672403L, Power=0.0625W, Tolerance=±1%, Author="CERN DEM JLC", Component Type=Standard, CreateDate=03.12.2007, HelpURL=\\cern.ch\dfs\Applications\Altium\Datasheets\R0402_Phycomp_RC0402.pdf, LatestRevisionDate=17.10.2012, Manufacturer Part Number=R0402_24K_1%_0.0625W_100PPM, Mounted=Yes, Part Description="General Purpose Thick Film Chip Resistor", Part Number=R0402_24K_1%_0.0625W_100PPM, Pin Count=2, PressFit=No, Sense=No, SMD=Yes, Socket=No, Status="Not Recommended", TC=±100ppm/°C
R144: library part RES_1206, "SMD Resistor", Supplier Part Number 1=39K0871, Supplier 1=Newark
R178: library part R0402_3K9_1%_0.0625W_100PPM, "Resistor - 1%", Case=0402, Manufacturer=GENERIC, Manufacturer1 ComponentHeight=0.4mm, Manufacturer1 Example="YAGEO PHYCOMP", Manufacturer1 Part Number=232270673902L, Power=0.0625W, Tolerance=±1%, Author="CERN DEM JLC", Component Type=Standard, CreateDate=03.12.2007, HelpURL=\\cern.ch\dfs\Applications\Altium\Datasheets\R0402_Phycomp_RC0402.pdf, LatestRevisionDate=17.10.2012, Manufacturer Part Number=R0402_3K9_1%_0.0625W_100PPM, Mounted=Yes, Part Description="General Purpose Thick Film Chip Resistor", Part Number=R0402_3K9_1%_0.0625W_100PPM, Pin Count=2, PressFit=No, Sense=No, SMD=Yes, Socket=No, Status="Not Recommended", TC=±100ppm/°C
T1 T2: "45V 100mA Dual NPN General-Purpose Transistor", Case=SOT363, Manufacturer="NXP SEMICONDUCTORS", Author="CERN DEM JMW", Bonding=No, Component Type=Standard, ComponentHeight=1.1mm, CreateDate=10.07.2015, Device=BC847BS, HelpURL=\\cern.ch\dfs\Applications\Altium\Datasheets\BC847BS.pdf, LatestRevisionDate=10.07.2015, Manufacturer Part Number=BC847BS, Mounted=Yes, PackageDescription="SOT363, SC-88, SOT, 0.65mm Pitch, 6 pin, 1.25mm W X 2.00mm L X 1.10mm H, IPC Medium Density", Part Description="45V 100mA Dual NPN General-Purpose Transistor", Part Number=BC847BS, Pin Count=6, PressFit=No, Sense=No, SMD=Yes, Socket=No

## Via types
v1: diameter 0.5, hole 0.2, Top to Bot, tented both sides, 239 vias
v2: diameter 0.5, hole 0.2, Top to Bot, 9 vias

## Nets (pads, with @x,y where several pads share a name; then routed paths per layer and width w, separated by ;. In a path a pad name is that pad's centre, name@x,y a point inside that pad or via, vN(x,y) a via of type N, cw(c..) or ccw(c..) an arc to the next point about the centre after c; other vN are vias at no path point)
DEV_RESETn: MD1.35 R2.1 | length 21.8
  Top w0.127: MD1.35 v1(4.36,15.64) ; R2.1 6.215,33.715 6.285,33.715 v1(6.9,33.1)
  Bot w0.127: v1(4.36,15.64) 3.7,16.3 3.7,17.9 5.1,19.3 5.1,25.7 6.25,26.85 6.25,28.75 7.4,29.9 7.4,32.637 6.937,33.1 v1(6.9,33.1)
ESP_EN: MD1.3 PB2.1 R17.2 T1.6 | length 37.4
  Top w0.127: PB2.1 v1(15.4,41) ; MD1.3 21.63,11.83 22.17,12.37 R17.2 v1(22.7,13.2)
  Bot w0.127: v1(15.4,41) 15.4,38.1 16.2,37.3 16.2,37 17.3,35.9 17.3,35.239 16.8,34.739 16.559,34.498 16.498,34.498 16.4,34.4 16.4,34.375 16.275,34.25 T1.6 16,32.6 17.232,31.368 17.232,27.968 17.6,27.6 19,27.6 20.3,26.3 20.3,15.6 v1(22.7,13.2)
ESP_IO0: J5.10 MD1.27 T1.3 | length 55.1
  Top w0.127: MD1.27 3.55,25.8 3.925,25.425 3.925,25.375 4.3,25 8.3,25 8.6,24.7 v1(9.4,24.7) ; v1(8.3,58.6) 8.6,58.3 v1(11.1,58.3)
  Bot w0.127: J5.10 6.2,62.3 8.3,60.2 v1(8.3,58.6) ; v1(9.4,24.7) 9.4,27 12.2,29.8 12.2,31.7 12.8,32.3 12.8,33.4 ; v1(11.1,58.3) 11.1,56.5 10.9,56.3 10.9,40.1 11.8,39.2 11.8,34.4 12.8,33.4 ; T1.3 13.25,35.55 13,35.3 13,33.6 12.8,33.4
ESP_IO36: J5.12 MD1.29 | length 41.3
  Top w0.127: MD1.29 v1(4.36,23.26)
  Bot w0.127: J5.12 4.424,57.876 6.024,57.876 6.6,57.3 6.6,55.6 7.6,54.6 7.6,47.2 8,46.8 8,39.3 6.9,38.2 6.9,36.9 5.8,35.8 5.8,32.4 7.072,31.128 7.072,30.072 5.716,28.716 5.716,26.916 4.36,25.56 v1(4.36,23.26)
ESP_IO37: J7.7 MD1.30 | length 38.8
  Top w0.127: MD1.30 v1(4.36,21.99) ; J7.7 5.5,53.8 v1(6.4,54.7)
  Bot w0.127: v1(4.36,21.99) 3.8,22.55 3.8,25.7 4.9,26.8 4.9,31.4 5.1,31.6 5.1,37.5 7.5,39.9 7.5,46.6 7.1,47 7.1,54 v1(6.4,54.7)
ESP_IO38: J7.11 MD1.31 | length 32.2
  Top w0.127: MD1.31 v1(4.36,20.72) ; J7.11 5.5,45.8 v1(6.4,46.7)
  Bot w0.127: v1(4.36,20.72) 3.2,21.88 3.2,25.7 4.6,27.1 4.6,39.6 7,42 7,46.1 v1(6.4,46.7)
ESP_IO39: J7.12 MD1.32 | length 31.6
  Top w0.127: MD1.32 v1(4.36,19.45) ; J7.12 5.5,43.8 v1(6.4,44.7)
  Bot w0.127: v1(4.36,19.45) 2.7,21.11 2.7,27.8 2.4,28.1 2.4,31.6 4.05,33.25 4.05,40.05 6.4,42.4 v1(6.4,44.7)
ETH_CLK: J7.10 MD1.7 | length 65.6
  Top w0.127: v1(0.6,40.4) 1.1,40.9 1.8,40.9 3.35,42.45 6.05,42.45 6.7,43.1 6.7,44.2 6.9,44.4 6.9,46.9 6.6,47.2 6.2,47.2 6.025,47.375 4.425,47.375 J7.10 ; v1(6,12) 6.5,11.5 17.8,11.5 18.9,12.6 18.9,16.1 19.71,16.91 MD1.7
  Bot w0.127: v1(0.6,40.4) 0.533,40.333 0.533,40.17 0.5,40.137 0.5,15.4 3.9,12 v1(6,12)
ETH_CSn: J7.3 MD1.17 | length 65.1
  Top w0.127: v1(1.5,38.4) 2.2,39.1 2.2,39.6 4.2,41.6 6.3,41.6 7.6,42.9 7.6,48.2 v1(6.6,49.2) ; v1(7.8,13.5) 8.2,13.9 8.2,17.3 16.445,25.545 MD1.17
  Bot w0.127: v1(1.5,38.4) 1.5,38.339 1.3,38.139 1.3,16.2 4.3,13.2 7.5,13.2 v1(7.8,13.5) ; J7.3 5.5,49.8 6.038,49.261 6.539,49.261 v1(6.6,49.2)
ETH_INT: J7.8 MD1.12 | length 71.3
  Top w0.127: J7.8 v2(6.4,51.8) ; v1(16.3,12.6) 17.477,13.777 17.477,21.677 19.06,23.26 MD1.12
  Layer 1 w0.127: v1(2.4,37.1) 3.8,38.5 3.8,39.6 4.95,40.75 6.45,40.75 8.6,42.9 8.6,49.6 v2(6.4,51.8)
  Bot w0.127: v1(2.4,37.1) 2.4,35.6 2.1,35.3 2.1,16.9 4.8,14.2 8.7,14.2 10.3,12.6 v1(16.3,12.6)
ETH_MISO: J7.4 MD1.15 | length 67.7
  Top w0.127: v1(1,39.7) 1.5,39.7 3.8,42 6.2,42 7.2,43 7.2,47.3 6.724,47.776 6.401,47.776 v1(6.377,47.8) ; v1(7.2,12.6) 8.5,12.6 8.9,13 8.9,17 17.1,25.2 18.385,25.2 18.985,25.8 MD1.15
  Bot w0.127: v1(1,39.7) 0.933,39.633 0.933,39.47 0.9,39.437 0.9,15.8 4.1,12.6 v1(7.2,12.6) ; J7.4 v1(6.377,47.8)
ETH_MOSI: J7.2 MD1.18 | length 64.7
  Top w0.127: v1(1.9,37.9) 1.9,37.961 2.539,38.6 2.823,38.6 3.2,38.977 3.2,40 4.5,41.3 6.5,41.3 7.9,42.7 7.9,49.4 v1(6.4,50.9) ; v1(6.8,13.7) 7.5,14.4 7.5,17.3 15.175,24.975 MD1.18
  Bot w0.127: v1(1.9,37.9) 1.9,37.239 1.7,37.039 1.7,16.6 4.6,13.7 v1(6.8,13.7) ; J7.2 5.5,51.8 v1(6.4,50.9)
ETH_RST: J7.6 MD1.6 | length 55.3
  Top w0.127: v1(1.7,13.4) 1.7,28.4 1.6,28.5 1.6,32 1.7,32.1 1.7,33.1 v1(3.1,34.5) ; v1(18.5,11.3) 19.4,12.2 19.4,15.3 19.74,15.64 MD1.6
  Bot w0.127: v1(1.7,13.4) 4.2,10.9 18.1,10.9 v1(18.5,11.3) ; v1(3.1,34.5) 3.1,35.8 3.3,36 3.3,41.2 4,41.9 J7.6
GND: C2.1 C3.1 C4.1 C5.2 C6.1 C7.2 C8.1 C9.2 C102.1 D2.1 D22.2 D23.2 D40.3 IC2.3 IC3.1 IC30.2 IC54.5 IC55.1 J3.6 J4.A1 J4.A12 J4.B1 J4.B12 J4.SHIELD J5.7 J5.11 J6.7 J6.11 J7.1 J7.5 J7.9 J8.1 J8.5 J8.9 LD9.1 MD1.1 MD1.40 MD1.PAD MP1.1 MP2.1 PB2.2 R1.1 R8.1 R10.1 R14.2 T2.1 T2.4 | length 76.9
  Top w0.127: LD9.1 v1(14.5,33.7)
  Top w0.2: v1(6.8,34.3) T2.4 ; T2.1 v1(9.2,36.5) ; IC2.3 14.25,37.6 v1(15.1,37.6)
  Top w0.203: R14.2 v1(11.7,65.3) ; IC54.5 v1(13.555,61) ; D40.3 v1(14.55,62.15) ; R8.1 v1(17.97,38.27) ; v1(22.6,30.4) 22.6,30 D2.1
  Top w0.3: MD1.PAD@12.1,15.605 12.448,15.953 12.453,15.953 v1(12.8,16.3) ; MD1.PAD@12.1,18.405 12.448,18.057 12.448,18.052 v1(12.8,17.7) ; MD1.PAD@14.9,15.605 14.205,16.3 v1(14.2,16.3) ; MD1.PAD@14.9,18.405 14.2,17.705 v1(14.2,17.7) ; PB2.2 15.95,49.4 C6.1 ; J4.SHIELD@18.135,34.048 18.135,34.059 18.474,34.398 J4.B1 19.86,34.398 19.86,34.073 20.285,33.648 J4.SHIELD@20.285,33.643 ; J4.SHIELD@18.135,40.248 18.135,40.238 18.474,39.898 J4.B12 19.855,39.898 19.855,40.223 J4.SHIELD@20.285,40.653 ; J4.SHIELD@20.285,33.398 J4.SHIELD@20.285,33.643 ; J4.SHIELD@20.285,40.898 J4.SHIELD@20.285,40.653 ; J4.SHIELD@22.435,34.048 22.435,34.059 22.095,34.398 J4.A12 20.715,34.398 20.715,34.073 J4.SHIELD@20.285,33.643 ; J4.SHIELD@22.435,40.248 22.435,40.238 22.095,39.898 J4.A1 20.71,39.898 20.71,40.223 20.285,40.648 J4.SHIELD@20.285,40.653 ; v1(12.8,16.3) 12.8,16.305 MD1.PAD@13.5,17.005 ; v1(12.8,16.3) 12.448,16.652 12.448,16.657 12.1,17.005 12.448,17.353 12.453,17.353 v1(12.8,17.7) ; v1(12.8,16.3) 12.805,16.3 13.5,15.605 13.848,15.953 13.853,15.953 v1(14.2,16.3) ; v1(12.8,17.7) 12.8,17.705 13.5,18.405 13.848,18.057 13.848,18.052 v1(14.2,17.7) ; v1(12.8,17.7) 12.805,17.7 MD1.PAD@13.5,17.005 ; MD1.PAD@13.5,17.005 13.848,16.657 13.848,16.652 v1(14.2,16.3) ; MD1.PAD@13.5,17.005 13.848,17.353 13.853,17.353 v1(14.2,17.7) ; v1(14.2,16.3) 14.2,16.305 14.9,17.005 14.205,17.7 v1(14.2,17.7)
  Top w0.5: J7.9 v1(6.377,49.8) ; v1(8.15,62.35) C5.2 ; C8.1 v1(11.5,46.1) ; C7.2 v1(13.55,45.45) ; v1(12.9,52.3) 12.9,53.395 IC55.1 ; v1(17.623,49.8) J8.9
  Top w0.9: v1(1.59,9.29) MD1.40 v1(4.91,9.29)
  Bot w0.203: v1(15.9,62.7) D23.2 ; D22.2 16.248,67.652 16.248,67.519 16.367,67.4 v1(16.9,67.4) ; v1(23.17,38.23) R1.1
  Bot w0.381: v1(7.45,18.93) C9.2 ; IC30.2 v1(9.97,22)
  Bot w0.5: J7.5 v1(6.377,45.8) ; J7.1 v1(6.377,53.8) ; J5.11 4.25,60.55 5.95,60.55 v1(6.4,61) ; R10.1 v1(11.43,25.867) ; v1(17.6,46.1) 17.957,46.1 18.007,46.05 19.75,46.05 J8.5 ; v1(17.6,59.9) 17.75,60.05 19.75,60.05 J6.11 ; v1(17.623,53.8) J8.1
  Bot w1: J5.7 6.1,68.3 v1(7,69.2) v1(8.7,69.2) ; v1(15.3,69.2) v1(17,69.2) 17.9,68.3 J6.7
  other v1: 22.7,8.8 22,8.9 23.4,8.9 6,9 7,9 8,9 9,9 10,9 11,9 12,9 13,9 14,9 15,9 16,9 17,9 18,9 19,9 2.2,9.28 4.3,9.3 23.4,9.5 19.1,11 1.3,11.4 5.4,11.4 7.6,12 16.8,12 1.7,12.6 8.4,13.2 16.1,15.3 6.5,15.7 5,15.9 9.7,16.8 22.1,17.1 15.7,18.5 22.1,18.8 14.6,19.3 19.2,19.4 4.6,20.1 19,21.3 21.9,21.3 4.6,21.4 4.6,22.6 11.2,22.7 21.9,22.7 8.9,25.2 3.2,26.7 21.8,27 2.9,28.3 13.7,28.3 15.7,28.4 5.4,29.2 7.5,29.3 15.1,31.9 6.3,32.8 2.6,33.1 2.6,35 22.6,36.533 18.6,37.6 8,37.8 22.6,37.8 2.6,38 5.5,39 2.7,39.1 1.6,39.2 13.4,40.1 1.3,40.4 14,40.7 19.1,41.7 21.9,42.2 16.9,42.8 17.5,43.7 6.5,48.5 15.95,50.15 6.5,52.5 17.6,52.6 2.5,56 21.5,56 15.7,57.5 13.3,57.9 7.6,58.4 11.1,59.1 7.85,69.2 16.15,69.2 1,72.5 5.5,72.5 10.5,72.5 15.5,72.5 22.5,72.5
GSM_PWR: J5.9 MD1.34 R7.2 | length 57.1
  Top w0.127: MD1.34 4.39,16.91 v1(4.4,16.9)
  Layer 1 w0.127: v1(4.4,16.9) 2.4,18.9 2.4,28.4 2,28.8 2,31.7 3.6,33.3 3.6,36.4 6.623,39.423 6.923,39.423 v1(9.4,41.9)
  Bot w0.127: J5.9 6.2,64.3 7.5,63 7.5,62.2 9.4,60.3 v1(9.4,41.9) ; v1(4.4,16.9) R7.2
HSPI_AD0: J8.8 MD1.39 | length 55
  Top w0.127: v2(1.9,10.8) 2.14,10.56 MD1.39 ; v2(17.6,51.8) J8.8
  Layer 1 w0.127: v2(1.9,10.8) 1.1,10.8 0.86,11.041 0.86,12.16 0.9,12.2 0.9,34.9 4.2,38.2 4.2,39.2 5.125,40.125 6.325,40.125 10.6,44.4 13.3,44.4 17.1,48.2 17.1,50.1 17.6,50.6 v2(17.6,51.8)
HSPI_AD1: J8.10 MD1.38 | length 49.3
  Top w0.127: v2(1.93,11.83) MD1.38 ; v2(17.5,47.8) J8.10
  Layer 1 w0.127: v2(1.93,11.83) 1.876,11.884 1.616,11.884 1.2,12.3 1.2,34.5 4.5,37.8 4.5,38.8 5.4,39.7 6.5,39.7 10.8,44 13.7,44 v2(17.5,47.8)
HSPI_AD2: J8.12 MD1.4 | length 35.6
  Top w0.127: J8.12 20,42.4 20.3,42.1 21.1,42.1 v1(21.7,41.5) ; MD1.4 21.8,13.1 22.6,13.9 v1(23.4,13.9)
  Bot w0.127: v1(21.7,41.5) 21.7,39.5 21.3,39.1 21.3,36.2 22.1,35.4 22.8,35.4 23.3,34.9 23.3,29.7 23.52,29.48 23.52,15.22 23.4,15.1 v1(23.4,13.9)
HSPI_AD3: J8.3 MD1.5 | length 44.1
  Top w0.127: MD1.5 21.87,14.37 v1(22.2,14.7)
  Bot w0.127: J8.3 19.575,49.375 18.075,49.375 16.3,47.6 16.3,44.2 17.5,43 17.5,42.8 17.9,42.4 20.4,42.4 21.2,41.6 21.2,39.9 20.9,39.6 20.9,35.9 21.6,35.2 21.6,30.5 23.2,28.9 23.2,15.7 v1(22.2,14.7)
HSPI_CLK: J8.4 MD1.20 | length 37.1
  Top w0.127: v2(8.2,29.3) 9.4,29.3 9.6,29.1 11.4,29.1 12.635,27.865 MD1.20
  Layer 1 w0.127: v2(8.2,29.3) 7.2,30.3 7.2,31.3 6.6,31.9 5.6,31.9 5,32.5 5,36 9.6,40.6 11,40.6 12,41.6 12,42.5 12.6,43.1 14.2,43.1 15.7,44.6 16.7,44.6 v1(17,44.3)
  Bot w0.127: v1(17,44.3) 17,44.327 16.7,44.627 16.7,46.9 17,47.2 17.9,47.2 18.5,47.8 J8.4
HSPI_CS0: J8.6 MD1.22 | length 40.1
  Top w0.127: v2(2.9,29) 3.6,28.3 9.6,28.3 9.989,27.911 9.989,27.151 MD1.22
  Layer 1 w0.127: v2(2.9,29) 2.3,29.6 2.3,31.3 4.1,33.1 4.1,36.2 9.3,41.4 10.1,41.4 10.6,41.9 10.6,42.6 11.7,43.7 13.9,43.7 16.9,46.7 v1(17.4,46.7)
  Bot w0.127: v1(17.4,46.7) 17,46.3 17,45 17.884,44.116 19.684,44.116 J8.6
HSPI_ID: J8.2 MD1.19 | length 40.8
  Top w0.127: MD1.19 13.53,27.42 13.53,27.77 11.8,29.5 10.2,29.5 9.8,29.9 9.8,31.5 9,32.3 6.1,32.3 5.4,33 5.4,35.6 7.559,37.759 7.559,37.982 7.977,38.4 8.5,38.4 10.3,40.2 11.5,40.2 12.4,41.1 12.4,42.2 12.823,42.623 15.523,42.623 16.129,43.229 16.329,43.229 v1(16.4,43.3)
  Bot w0.127: v1(16.4,43.3) 15.9,43.8 15.9,48.2 17.1,49.4 17.1,50.4 18.5,51.8 J8.2@19.8,51.8
HSPI_Q: J8.11 MD1.21 | length 35.6
  Top w0.127: v2(4.1,29.1) 4.5,28.7 10.1,28.7 10.979,27.821 10.979,27.431 MD1.21 ; v2(17.5,45.4) 17.784,45.684 19.884,45.684 J8.11
  Layer 1 w0.127: v2(4.1,29.1) 4.1,29.5 4.6,30 4.6,36.2 9.4,41 10.7,41 11.5,41.8 11.5,42.8 12.1,43.4 13.992,43.4 15.792,45.2 16.4,45.2 16.6,45.4 v2(17.5,45.4)
HSPI_sAD0: J6.10 MD1.8 | length 60.6
  Top w0.127: v1(13.2,41.9) 13.5,42.2 19.4,42.2 v1(19.7,41.9) ; MD1.8 21.92,18.18 v1(22.3,17.8)
  Bot w0.127: v1(13.2,41.9) 13.2,43.6 13,43.8 13,50.2 13.5,50.7 13.5,52.8 12.7,53.6 12.7,59.3 15.4,62 17.3,62 17.6,62.3 J6.10 ; v1(19.7,41.9) 19.7,38.6 20.5,37.8 20.5,35.4 21.2,34.7 21.2,30.1 22.8,28.5 22.8,18.3 v1(22.3,17.8)
HSPI_sAD1: J6.12 MD1.9 | length 46.3
  Top w0.127: MD1.9 v1(21.85,19.45)
  Bot w0.127: J6.12 18.5,58.3 17.3,57.1 17.3,55.6 16.6,54.9 16.6,49.7 15.6,48.7 15.6,43.3 17.3,41.6 18.4,41.6 19.3,40.7 19.3,38.4 20.1,37.6 20.1,34.8 20.9,34 20.9,29.719 22.4,28.219 22.4,20 v1(21.85,19.45)
MODBUS_A: D40.2 IC54.6 J6.4 R13.2 R144.2 | length 16.9
  Top w0.127: R13.2 13.5,63.65 R144.2 12.3,63.5 11.635,62.835 IC54.6 11.635,59.9 11.935,59.6 13.1,59.6 14,60.5 15.5,60.5 16.1,61.1 16.3,61.1 16.85,61.65 D40.2 17.65,62.45 17.8,62.3 J6.4
MODBUS_B: D40.1 IC54.7 J6.6 R14.1 R144.1 | length 17.3
  Top w0.127: R14.1 10.13,65.28 10.345,65.065 10.362,65.065 10.45,64.977 R144.1 10.45,62.15 10.365,62.065 IC54.7 10.365,60 10.765,59.6 11.3,59.6 11.7,59.2 13.5,59.2 14.4,60.1 15.6,60.1 16.05,60.55 D40.1 16.85,59.95 18.5,58.3 J6.6
MODBUS_DE: IC54.2 IC54.3 IC55.3 | length 3.5
  Top w0.127: IC55.3 IC54.2 IC54.3
MODBUS_DI: D3.3 IC54.4 IC55.2 MD1.10 | length 45.6
  Top w0.127: IC55.2 11.635,53.875 11.859,54.099 11.899,54.099 12.681,54.881 12.681,55.376 IC54.4 13.9,55.6 14.4,55.1 v1(14.9,55.1) 14.971,55.029 14.971,54.879 15.117,54.733 15.288,54.733 15.55,54.471 D3.3 ; MD1.10 21.58,20.72 v1(21.9,20.4)
  Bot w0.127: v1(14.9,55.1) 15.9,54.1 15.9,51.1 15.2,50.4 15.2,43.2 16.5,41.9 16.5,38.2 18.3,36.4 18.3,35.4 19,34.7 19,32.7 20,31.7 20,29 20.8,28.2 20.8,21.5 v1(21.9,20.4)
MODBUS_RO: MD1.11 R160.1 | length 47.3
  Top w0.127: R160.1 7.62,56.27 7.835,56.485 7.835,56.505 8.43,57.1 v1(13.2,57.1) ; v1(14.1,41.6) 16.1,41.6 17.1,40.6 v1(17.1,39.3) ; MD1.11 v1(21.847,21.99)
  Bot w0.127: v1(13.2,57.1) 13.8,56.5 13.8,48.623 14.1,48.323 v1(14.1,41.6) ; v1(17.1,39.3) 17.4,39 18.1,39 19.4,37.7 19.4,32.8 20.5,31.7 20.5,29.594 21.2,28.894 21.2,22.637 v1(21.847,21.99)
NetC1_1: C1.1 IC3.6 | length 1.5
  Bot w0.3: C1.1 13.41,25.14 13.41,24.99 13.499,24.901 13.8,24.6 IC3.6
NetC1_2: C1.2 IC3.2 L1.1
NetC6_2: C6.2 D3.2 IC55.6 IC55.7 R178.2 | length 10.6
  Top w0.127: IC55.6 IC55.7 11.635,50.035 12.801,51.2 14.569,51.2 14.823,50.946 14.843,50.946 15.07,50.72 R178.2 15.296,50.926 15.296,50.996 15.6,51.3 16.25,51.3 ; D3.2 16.25,51.75 16.25,51.3 ; C6.2 16.25,51.3
NetC8_2: C8.2 IC55.5 | length 2
  Top w0.127: IC55.5 9.1,47.995 C8.2 C8.2@9.1,46
NetIC2_4: IC2.4 R12.1 T2.3 | length 5
  Top w0.127: T2.3 7.475,36.625 7.475,36.975 7.8,37.3 9.4,37.3 9.53,37.17 R12.1 10.22,37.17 10.7,37.65 IC2.4
NetIC3_4: IC3.4 R9.1 R10.2 | length 2.9
  Bot w0.127: R9.1 11.83,24.07 IC3.4 11.9,24.25 12.37,24.72 R10.2
NetIC54_1: IC54.1 R160.2 | length 1.6
  Top w0.127: 8.5,55.6 IC54.1
  Top w0.152: R160.2 8.23,55.33 8.5,55.6
NetJ4_A5: J4.A5 R1.2 | length 1.8
  Top w0.127: J4.A5 21.598,37.898 v1(21.9,38.2)
  Bot w0.127: v1(21.9,38.2) 21.9,38.57 21.996,38.666 22.016,38.666 22.23,38.88 R1.2
NetJ4_B5: J4.B5 R8.2 | length 2.6
  Top w0.127: R8.2 17.32,37.33 17.535,37.115 17.535,37.095 18.232,36.398 J4.B5
NetLD9_2: LD9.2 R124.1 | length 1
  Top w0.2: R124.1 LD9.2
NetR2_2: R2.2 T2.2 | length 3.3
  Top w0.127: R2.2 6.57,34.87 7,35.3 7.8,35.3 8,35.5 T2.2
NetR3_1: R3.1 T2.5 | length 1.3
  Top w0.127: R3.1 8,33.07 T2.5
NetR4_2: R4.2 T1.2 | length 2.8
  Bot w0.127: T1.2 14.5,34.9 14.8,35.2 14.8,36 14.53,36.27 R4.2
NetR6_2: R6.2 T1.5 | length 3.1
  Bot w0.127: R6.2 14.57,32.82 14.785,33.035 14.805,33.035 15.1,33.33 15.1,34.6 15.4,34.9 T1.5
P3V3: C3.2 C4.2 C9.1 C102.2 IC2.5 IC30.4 L1.2 MD1.2 R7.1 R9.2 R11.2 R12.2 R15.2 R17.1 R124.2 | length 62
  Top w0.2: R12.2 v1(10.2,35.56) 10.66,35.56 10.85,35.75 IC2.5
  Top w0.381: v1(5.63,24.33) 5.63,21.57 6.55,20.65 v1(6.55,18.95)
  Top w0.4: v1(5.63,24.33) v1(8.17,24.33) 8.7,23.8 10.2,23.8 10.6,24.2 v1(10.6,25) ; v1(9.5,33.7) R124.2 10.23,33.27 11.1,32.4 11.5,32.4 12.4,31.5 12.4,30 v1(13,29.4) ; v1(9.8,16) 9.8,15.2 10.8,14.2 16,14.2 v1(17,15.2)
  Bot w0.2: R9.2 10.5,22.6 10.8,22.3 10.8,20.6 10.3,20.1 10.3,17.1 11.7,15.7 15.5,15.7 15.7,15.9 17.066,15.9 17.3,16.134 C4.2
  Bot w0.381: v1(5.63,24.33) R15.2 ; R11.2 v1(8.17,24.33)